# Altium PCB ApeSmartScale.PcbDoc
Units mil, origin at the board's own origin, x right, y up, seen from the top; angles counter-clockwise.
Board outline 2800 x 1000 mil, 2 copper layers (Top Layer, Bottom Layer); 8 components, 29 nets, 63 pads, 56 vias.
Unrouted connection lines stored in the file: 1.
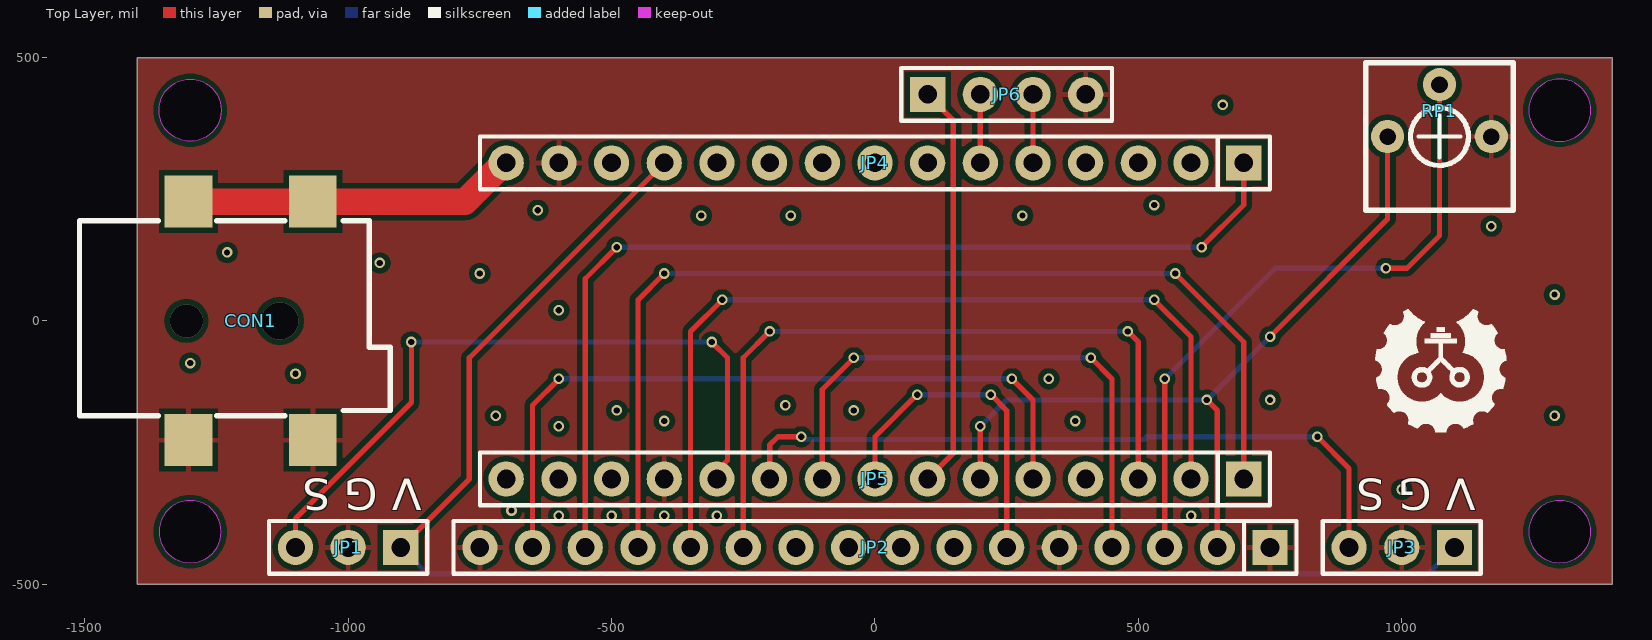
[diagram p0: Top Layer view]
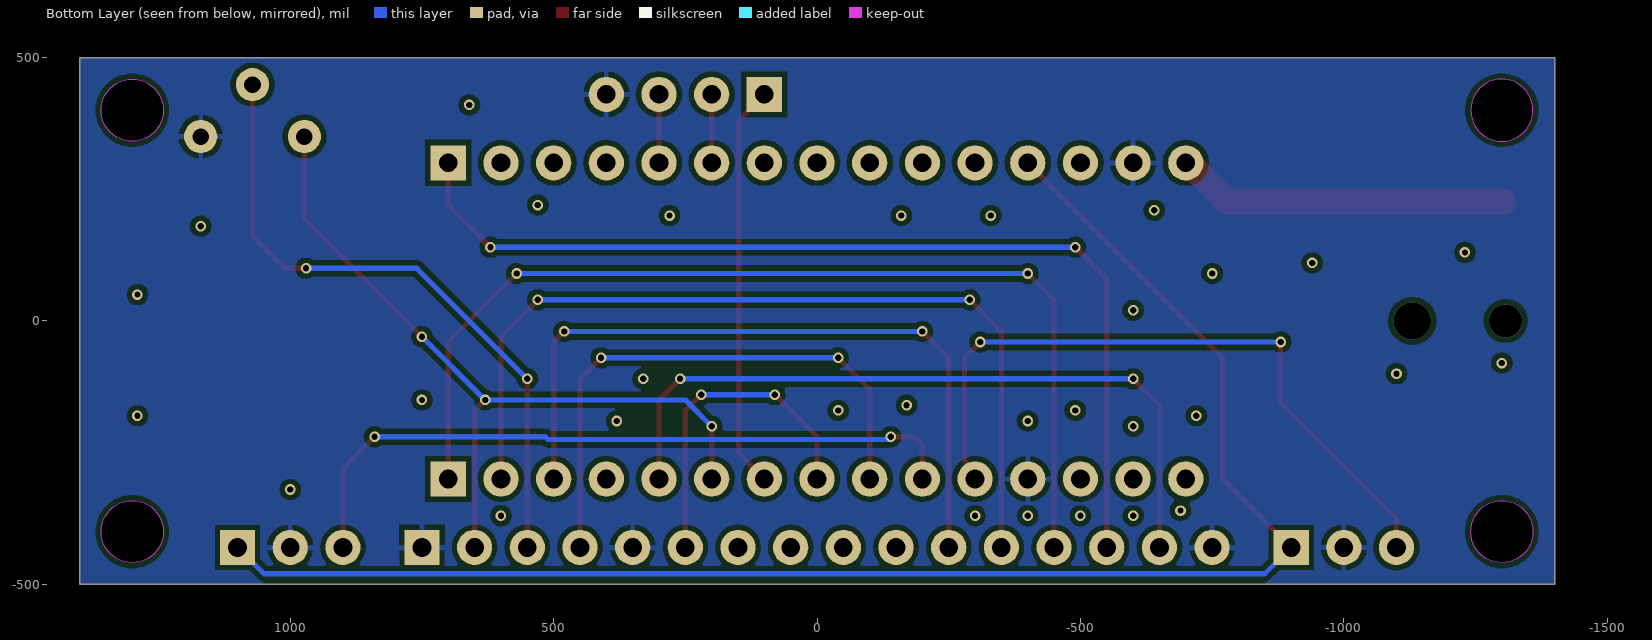
[diagram p1: Bottom Layer view, seen from below]

## Layer stack, top to bottom
Top Solder: solder mask 0.4, Solder Resist, Dk 3.5
Top Layer: signal copper 1.4
Dielectric 1: dielectric 12.6, FR-4, Dk 4.8
Bottom Layer: signal copper 1.4
Bottom Solder: solder mask 0.4, Solder Resist, Dk 3.5

## Board outline
-1400,-500 -1400,500 1400,500 1400,-500
cut-out: -1300,340.94 cw(c-1300,400) -1359.06,400 cw(c-1300,400) -1300,459.06 cw(c-1300,400) -1240.94,400 cw(c-1300,400)
cut-out: 1240.94,400 ccw(c1300,400) 1300,340.94 ccw(c1300,400) 1359.06,400 ccw(c1300,400) 1300,459.06 ccw(c1300,400)
cut-out: 1240.94,-400 ccw(c1300,-400) 1300,-459.06 ccw(c1300,-400) 1359.06,-400 ccw(c1300,-400) 1300,-340.94 ccw(c1300,-400)
cut-out: -1359.06,-400 ccw(c-1300,-400) -1300,-459.06 ccw(c-1300,-400) -1240.94,-400 ccw(c-1300,-400) -1300,-340.94 ccw(c-1300,-400)

## Design rules (kind name [scope] priority, off if disabled: settings)
Clearance [All] p1: gap=10 ignorepadtopadclearanceinfootprint=FALSE except(0: Arc-Hole Track-Hole SMDPad-Hole THPad-Hole Via-Hole Fill-Hole Poly-Hole Region-Hole Text-Hole)
PlaneConnect [All] p1: pad.planeconnectstyle=Relief pad.reliefexpansion=20 pad.reliefentries=4 pad.reliefconductorwidth=10 pad.reliefairgap=10 via.planeconnectstyle=NoConnect via.reliefexpansion=20 via.reliefentries=4 via.reliefconductorwidth=10 via.reliefairgap=10
PolygonConnect [All] p1: thpad.connectstyle=Relief thpad.reliefconductorwidth=10 thpad.reliefentries=4 thpad.polygonreliefangle="90 Angle" thpad.airgapwidth=10 smdpad.connectstyle=Relief smdpad.reliefconductorwidth=10 smdpad.reliefentries=4 smdpad.polygonreliefangle="90 Angle" smdpad.airgapwidth=10 via.connectstyle=NoConnect via.reliefconductorwidth=10 via.reliefentries=4 via.polygonreliefangle="90 Angle" via.airgapwidth=10
RoutingVias [All] p1: holewidth=12 width=20 viastyle="Through Hole" minholewidth=12 minwidth=20 maxholewidth=12 maxwidth=20
SolderMaskExpansion [All] p1: expansion=4
Width [All] p1: maxlimit=100 minlimit=10 preferedwidth=10
29 further rules are at their usual default settings.

## Components (designator, comment, footprint, x,y, rotation, side; value= is the part's Value field where it differs from the comment)
CON1 "3.5*1.3" DC-050 -1130,0 r0 top
JP1 "V G S" HDR2.54-LI-3P -1000,-430 r180 top
JP2 "HDR-1X16" HDR2.54-LI-16P 0,-430 r180 top
JP3 "V G S" HDR2.54-LI-3P 1000,-430 r180 top
JP4 "HDR-1X15" HDR2.54-M-LI-15P 0,300 r180 top
JP5 "HDR-1X15" HDR2.54-M-LI-15P 0,-300 r180 top
JP6 "HDR-1X4" HDR2.54-LI-4P 250,430 r0 top
RP1 "50K" 3362P 1071.57,350 r0 top

## Footprints (in the part's own frame and the unit in brackets; to place one, negate y for a bottom-side part, rotate by r counter-clockwise, add the part's x,y. Pads: shape width x height; smd on the part's side, far side on the other; paste and mask are expansions set on the pad)
3362P [mm]
  round 1.6 hole 0.8: 1(-2.5,0) 2(0,2.5) 3(2.5,0)
  silkscreen extent -3.56,-3.56 3.56,3.56, body extent -3.3,-3.3 3.3,3.3, height 4.74
DC-050 [mm] "5.5*2.1"
  rect 2.3x2.5 smd: 1(-4.4,5.75) 1(1.6,5.75) 2(1.6,-5.75) 3(-4.4,-5.75)
  silkscreen extent -9.65,-4.57 5.33,4.83, body extent -9.5,-6.3 5.3,6.3, height 11
HDR2.54-LI-3P [mm] "排针，3脚"
  rect 1.7x1.7 hole 0.9: 1(-2.54,0)
  round 1.7 hole 0.9: 2(0,0) 3(2.54,0)
  silkscreen extent -3.81,-1.27 3.81,1.27, body extent -3.81,-1.27 3.81,1.27, height 8.5
HDR2.54-LI-4P [mm] "排针，4脚"
  rect 1.7x1.7 hole 0.9: 1(-3.81,0)
  round 1.7 hole 0.9: 2(-1.27,0) 3(1.27,0) 4(3.81,0)
  silkscreen extent -5.08,-1.27 5.08,1.27, body extent -5.08,-1.27 5.08,1.27, height 8.5
HDR2.54-LI-16P [mm] "排针，16脚"
  rect 1.7x1.7 hole 0.9: 1(-19.05,0)
  round 1.7 hole 0.9: 2(-16.51,0) 3(-13.97,0) 4(-11.43,0) 5(-8.89,0) 6(-6.35,0) 7(-3.81,0) 8(-1.27,0) 9(1.27,0) 10(3.81,0) 11(6.35,0) 12(8.89,0) 13(11.43,0) 14(13.97,0) 15(16.51,0) 16(19.05,0)
  silkscreen extent -20.32,-1.27 20.32,1.27, body extent -20.32,-1.27 20.32,1.27, height 8.5
HDR2.54-M-LI-15P [mm] "排母，15脚"
  rect 1.7x1.7 hole 0.9: 1(-17.78,0)
  round 1.7 hole 0.9: 2(-15.24,0) 3(-12.7,0) 4(-10.16,0) 5(-7.62,0) 6(-5.08,0) 7(-2.54,0) 8(0,0) 9(2.54,0) 10(5.08,0) 11(7.62,0) 12(10.16,0) 13(12.7,0) 14(15.24,0) 15(17.78,0)
  silkscreen extent -19.05,-1.27 19.05,1.27, body extent -19.05,-1.27 19.05,1.27, height 8.5

## Part data
CON1: library part P-DC, "低压电源接口", BOM名称=DCµçÔ, 学习资源=www.ooocke.
JP1 JP3: library part "Header 3", "3P接插件", BOM名称=3P接, 学习资源=www.ooocke.
JP2: library part "Header 16", "16P接插件", BOM名称=16P接, 学习资源=www.ooocke.
JP4 JP5: library part "Header 15", "15P接插件", BOM名称=15P接, 学习资源=www.ooocke.
JP6: library part "Header 4", "4P接插件", BOM名称=4P接, 学习资源=www.ooocke.
RP1: library part RP-ID, "插件单联电位器"

## Via types
v1: diameter 20, hole 12, Top Layer to Bottom Layer, 54 vias
v2: diameter 62.99, hole 62.99, Top Layer to Bottom Layer, 1 vias
v3: diameter 70.87, hole 70.87, Top Layer to Bottom Layer, 1 vias

## Nets (pads, with @x,y where several pads share a name; then routed paths per layer and width w, separated by ;. In a path a pad name is that pad's centre, name@x,y a point inside that pad or via, vN(x,y) a via of type N, cw(c..) or ccw(c..) an arc to the next point about the centre after c; other vN are vias at no path point)
3V3: JP4.2
5V: JP1.1 JP3.1 JP4.12 | length 2978.5
  Top Layer w10: JP1.1 -770,-300 -770,-70 JP4.12
  Bottom Layer w10: JP1.1 -850,-480 1050,-480 JP3.1
A0: JP4.4
A1: JP4.5 JP6.3 | length 130
  Top Layer w10: JP4.5 JP6.3
A2: JP4.6 JP6.2 | length 130
  Top Layer w10: JP4.6 JP6.2
A3: JP4.7
A4: JP4.8
A5: JP4.9
A6: JP4.10
A7: JP4.11
AREF: JP4.3
D2: JP1.3 JP5.11 | length 1331.8
  Top Layer w10: JP1.3 -1100,-375.07 -880,-155.07 v1(-880,-40) ; v1(-310,-40) -280,-70 -280,-264.6 -300,-284.6 JP5.11
  Bottom Layer w10: v1(-880,-40) v1(-310,-40)
D3: JP3.3 JP5.10 | length 1349.7
  Top Layer w10: JP5.10 -200,-235.86 -184.14,-220 v1(-140,-220) ; v1(840,-220) 900,-280 JP3.3
  Bottom Layer w10: v1(-140,-220) -135,-225 510.97,-225 515.97,-220 v1(840,-220)
D4: JP2.4 JP5.9 | length 1081.4
  Top Layer w10: JP5.9 -100,-130 v1(-40,-70) ; v1(410,-70) 450,-110 JP2.4
  Bottom Layer w10: v1(-40,-70) v1(410,-70)
D5: JP2.6 JP5.8 | length 635.6
  Top Layer w10: JP5.8 0,-220 v1(80,-140) ; v1(220,-140) 250,-170 JP2.6
  Bottom Layer w10: v1(80,-140) v1(220,-140)
D6: JP5.7 JP6.1 | length 770.1
  Top Layer w10: JP5.7 148.46,-251.54 148.46,381.54 JP6.1
D7: JP2.2 JP5.6 RP1.1 | length 1481.1
  Top Layer w10: JP5.6 v1(200,-200) ; v1(630,-150) 650,-170 JP2.2 ; v1(750,-30) 973.15,193.15 RP1.1
  Bottom Layer w10: v1(200,-200) 250,-150 v1(630,-150) v1(750,-30)
D8: JP2.15 JP5.5 | length 1407.3
  Top Layer w10: JP2.15 -650,-160 v1(-600,-110) ; v1(260,-110) 300,-150 JP5.5
  Bottom Layer w10: v1(-600,-110) v1(260,-110)
D9: JP5.4
D10: JP2.11 JP5.3 | length 1399
  Top Layer w10: JP2.11 -250,-70 v1(-200,-20) ; v1(480,-20) 500,-40 JP5.3
  Bottom Layer w10: v1(-200,-20) v1(480,-20)
D11: JP2.12 JP5.2 | length 1683.8
  Top Layer w10: JP2.12 -350,-20 v1(-290,40) ; v1(530,40) 600,-30 JP5.2
  Bottom Layer w10: v1(-290,40) v1(530,40)
D12: JP2.13 JP5.1 | length 1954.6
  Top Layer w10: JP2.13 -450,40 v1(-400,90) ; v1(570,90) 700,-40 JP5.1
  Bottom Layer w10: v1(-400,90) v1(570,90)
D13: JP2.14 JP4.1 | length 1898
  Top Layer w10: JP2.14 -550,80 v1(-490,140) ; v1(620,140) 700,220 JP4.1
  Bottom Layer w10: v1(-490,140) v1(620,140)
GND: CON1.2 CON1.3 JP1.2 JP2.1 JP2.5 JP2.16 JP3.2 JP4.14 JP5.12 JP6.4 RP1.3
  other v1: -600,-370 -500,-370 -400,-370 -300,-370 600,-370 -690,-360 1000,-320 -600,-200 -400,-190 380,-190 -720,-180 1290,-180 -490,-170 -40,-170 -170,-160 750,-150 330,-110 -1100,-100 -1300,-80 -600,20 1290,50 -750,90 -940,110 -1230,130 1170,180 -330,200 -160,200 280,200 -640,210 530,220 660,410
RST: JP4.13 JP5.13
RX0: JP5.14
TX1: JP5.15
V0: JP2.3 RP1.2 | length 1240.9
  Top Layer w10: JP2.3 v1(550,-110) ; v1(970,100) 1010,100 1071.57,161.57 RP1.2
  Bottom Layer w10: v1(550,-110) 760,100 v1(970,100)
Vin: CON1.1 JP4.15 | length 633.7
  Top Layer w50: CON1.1@-1303.23,226.38 -1067.01,226.38 -778.2,226.38 -704.58,300 JP4.15
pads on no net: JP2.7 JP2.8 JP2.9 JP2.10
copper on no net:
  other v2: -1307.17,0
  other v3: -1130,0

## Polygon pours and split planes (outlines as drawn)
GND on Bottom Layer "Top Layer-No Net" (solid, remove dead copper, pour order 0): -1400,-500 -1400,500 1400,500 1400,-500
GND on Top Layer "Top Layer-No Net1" (solid, remove dead copper, pour order 1): -1400,-500 -1400,500 1400,500 1400,-500

## Silkscreen, mask and mechanical layers (free items; w line width, h text height)
Top Overlay:
  drawing of 1389 lines, arcs and shapes, not listed
Mechanical 1:
  circle w10: c1300,400 r59.06
  circle w10: c1300,-400 r59.06
  circle w10: c-1300,-400 r59.06
  circle w10: c-1300,400 r59.06
  lines w10: -1400,-500 1400,-500 1400,500 -1400,500 -1400,-500